# Altium PCB MatrixLED_8x8_1.9S_Pcb.PcbDoc
Units mil, origin at the board's own origin, x right, y up, seen from the top; angles counter-clockwise.
Board outline 780 x 780 mil, 2 copper layers (Top Layer, Bottom Layer); 8 components, 23 nets, 58 pads, 13 vias.
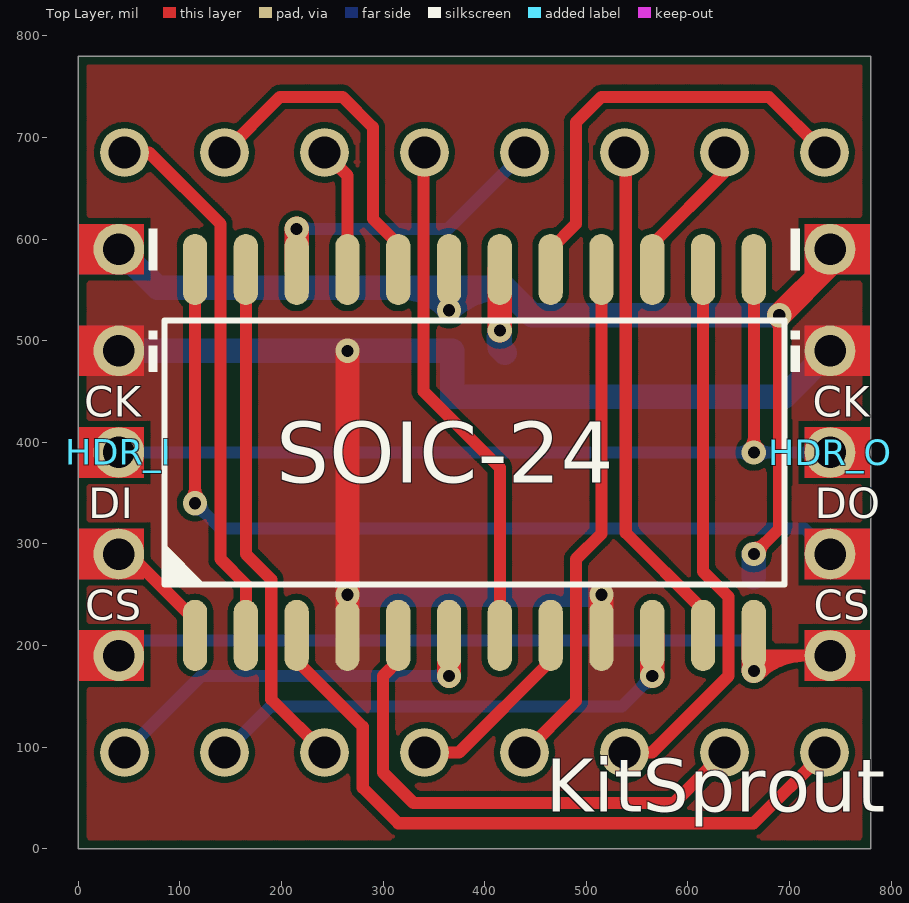
[diagram p0: Top Layer view]
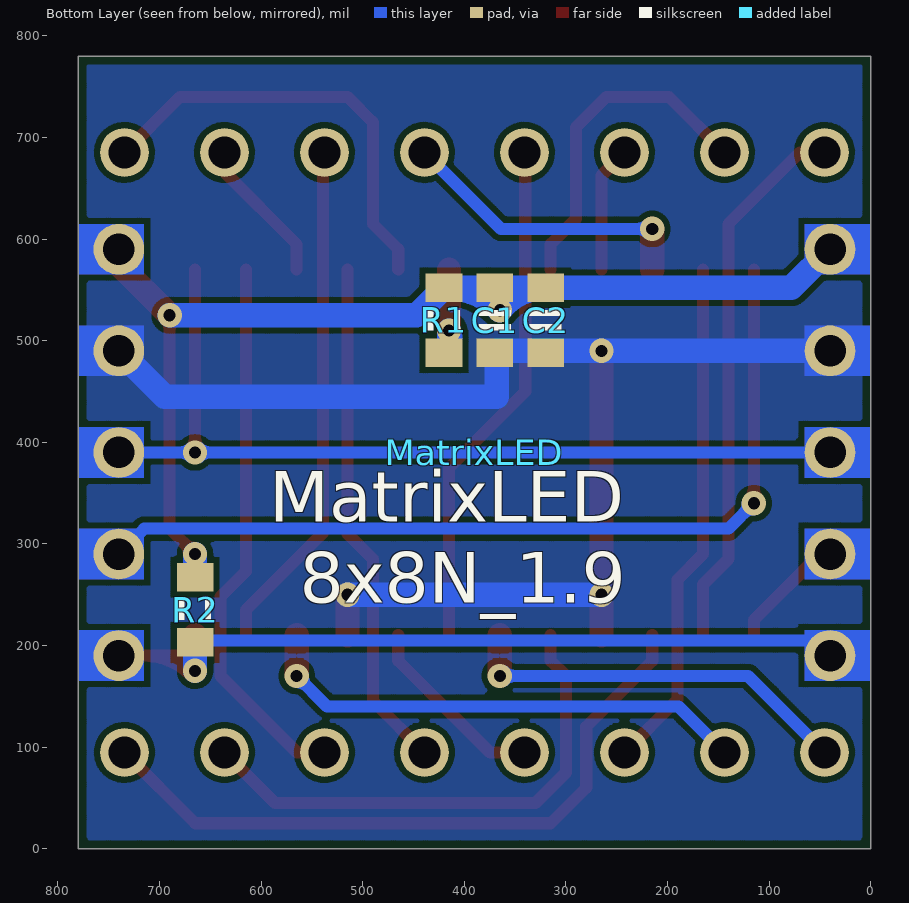
[diagram p1: Bottom Layer view, seen from below]
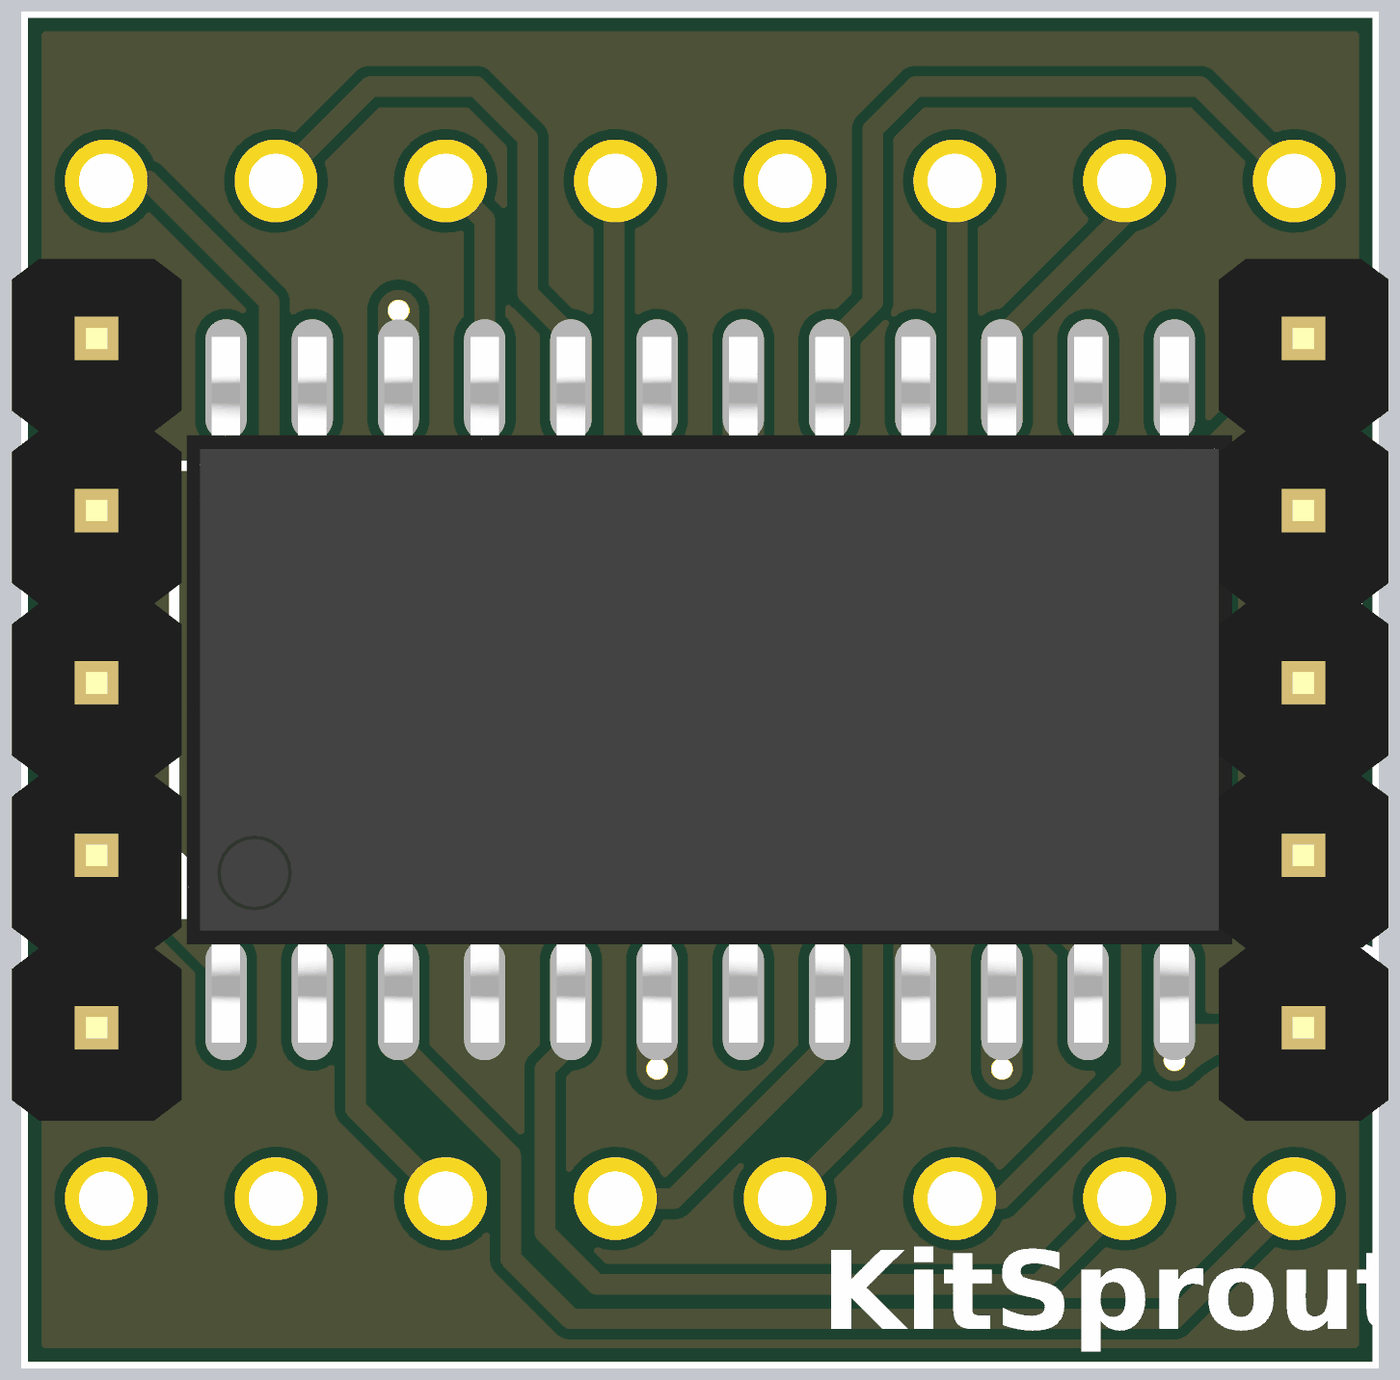
[diagram p2: 3D render of the assembled board from above, using the file's embedded part models]
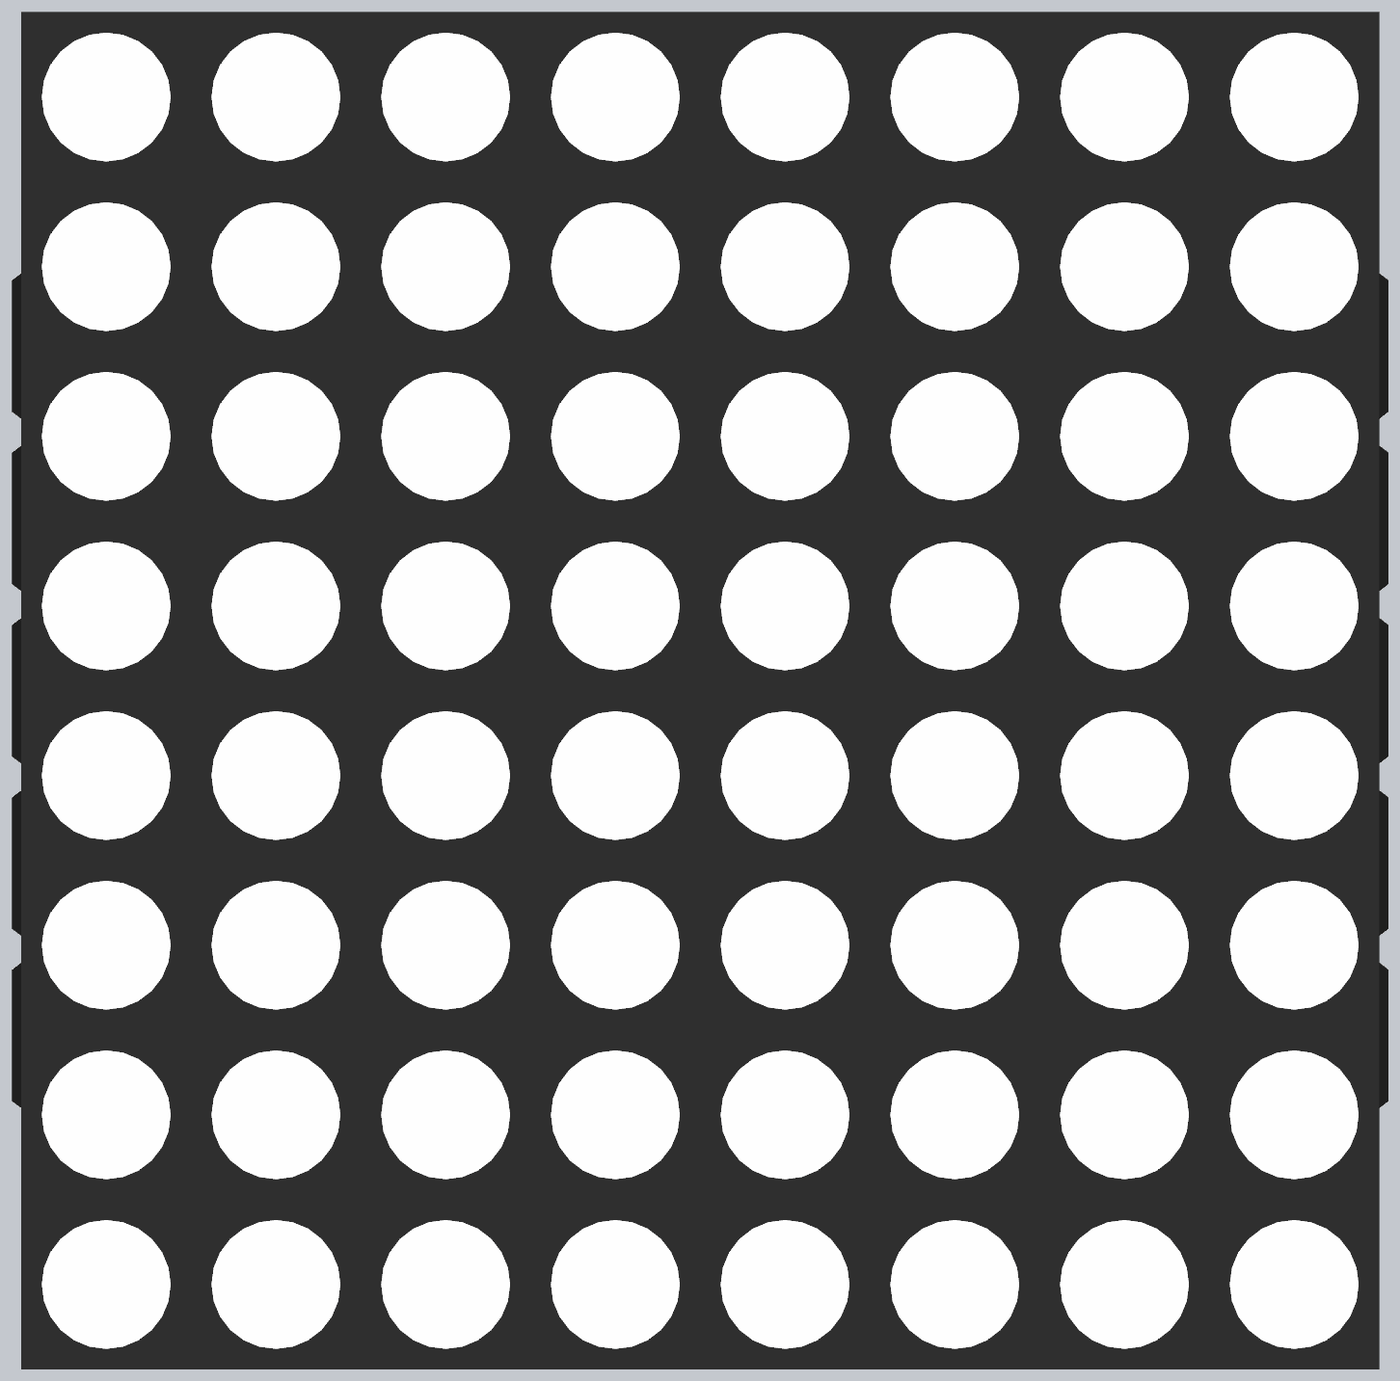
[diagram p3: 3D render of the assembled board from below, using the file's embedded part models]

## Layer stack, top to bottom
Top Solder: solder mask 0.4, Solder Resist, Dk 3.5
Top Layer: signal copper 1.4
Dielectric1: dielectric 12.6, FR-4, Dk 4.8
Bottom Layer: signal copper 1.4
Bottom Solder: solder mask 0.4, Solder Resist, Dk 3.5

## Board outline
0,0 780,0 780,780 0,780

## Design rules (kind name [scope] priority, off if disabled: settings)
Clearance ClearancePolygon [InPolygon] p1: gap=6
Clearance [All] p2: gap=6
ComponentClearance [All] p1: gap=0 collisioncheckmode=3 verticalgap=0 showdistances=FALSE
Height [All] p1: minheight=0 maxheight=5000 prefheight=500
HoleToHoleClearance [All] p1: gap=6 allowstackedmicrovias=TRUE
MinimumSolderMaskSliver [All] p1: minsoldermaskwidth=6
PlaneConnect [All] p1: planeconnectstyle=Direct reliefexpansion=20 reliefentries=4 reliefconductorwidth=20 reliefairgap=10
PolygonConnect [All] p1: connectstyle=Direct reliefconductorwidth=20 reliefentries=4 polygonreliefangle="90 Angle" airgapwidth=10
RoutingVias [All] p1: holewidth=12 width=20 viastyle="Through Hole" minholewidth=12 minwidth=20 maxholewidth=100 maxwidth=200
SilkToSilkClearance [All] p1: silktosilkclearance=0
SilkToSolderMaskClearance SilkscreenOverComponentPads [IsPad] p1: minsilkscreentomaskgap=1 clearancetoexposedcopper=TRUE
SolderMaskExpansion [All] p1: expansion=0
Width [All] p1: maxlimit=30 minlimit=6 preferedwidth=10
22 further rules are at their usual default settings.

## Components (designator, comment, footprint, x,y, rotation, side; value= is the part's Value field where it differs from the comment)
C1 "Cap_0603" CAP_0603 370,520 r90 bottom
C2 "Cap_0603" CAP_0603 320,520 r90 bottom
HDR_I "HDR1x5_2.54" HDR1X5_2.54_180 40,590 r0 top locked
HDR_O "HDR1x5_2.54" HDR1X5_2.54_180 740,590 r0 top locked
MatrixLED "LED_Matrix_8x8_1.9S" LED_Matrix_8x8_1.9S 390,390 r180 bottom locked
R1 "Res_0603" RES_0603 420,520 r90 bottom
R2 "Res_0603" RES_0603 665,235 r90 bottom
SOIC-24 "MAX7219/21" SOIC_E300_24 390,390 r90 top locked (schematic designator MAX7219)

## Footprints (in the part's own frame and the unit in brackets; to place one, negate y for a bottom-side part, rotate by r counter-clockwise, add the part's x,y. Pads: shape width x height; smd on the part's side, far side on the other; paste and mask are expansions set on the pad)
CAP_0603 [mil]
  rect 28x36 smd: 1(-32,0) 2(32,0)
  silkscreen extent -10,-16 10,16, body extent -31,-16 31,16, height 36
HDR1X5_2.54_180 [mil]
  round 50 hole 31: 1(0,0) 2(0,-100) 3(0,-200) 4(0,-300) 5(0,-400)
  body extent -49,-450 49,50, height 323
LED_Matrix_8x8_1.9S [mil]
  round 48 hole 31.5: 1(-344.49,-295.28) 2(-246.06,-295.28) 3(-147.64,-295.28) 4(-49.21,-295.28) 5(49.21,-295.28) 6(147.64,-295.28) 7(246.06,-295.28) 8(344.49,-295.28) 9(344.49,295.28) 10(246.06,295.28) 11(147.64,295.28) 12(49.21,295.28) 13(-49.21,295.28) 14(-147.64,295.28) 15(-246.06,295.28) 16(-344.49,295.28)
  body extent -394,-394 394,394, height 236
RES_0603 [mil]
  rect 28x36 smd: 1(-32,0) 2(32,0)
  silkscreen extent -10,-16 10,16, body extent -31,-16 32,16, height 20
SOIC_E300_24 [mil]
  oval 70x24 smd: 1(-180,275) 2(-180,225) 3(-180,175) 4(-180,125) 5(-180,75) 6(-180,25) 7(-180,-25) 8(-180,-75) 9(-180,-125) 10(-180,-175) 11(-180,-225) 12(-180,-275) 13(180,-275) 14(180,-225) 15(180,-175) 16(180,-125) 17(180,-75) 18(180,-25) 19(180,25) 20(180,75) 21(180,125) 22(180,175) 23(180,225) 24(180,275)
  silkscreen extent -130,-305 130,305, body extent -205,-308 205,298, height 102

## Part data
C1 C2: "Capacitor"
HDR_I: library part HDR1x5_2.54T, "Header"
HDR_O: "Header"
MatrixLED: "MatrixLED"
R1 R2: "Resistor"
SOIC-24: "Drivers"

## Via types
v1: diameter 24, hole 12, Top Layer to Bottom Layer, 13 vias

## Nets (pads, with @x,y where several pads share a name; then routed paths per layer and width w, separated by ;. In a path a pad name is that pad's centre, name@x,y a point inside that pad or via, vN(x,y) a via of type N, cw(c..) or ccw(c..) an arc to the next point about the centre after c; other vN are vias at no path point)
5V: C1.2 C2.2 HDR_I.1 HDR_O.1 R1.2 R2.2 SOIC-24.19 | length 1184.3
  Top Layer w12: v1(665,290) 690,315 v1(690,525) ; v1@665,296 ccw(c665,310.49) 675.24,300.24 ccw(c685.49,290) v1@671,290 ; v1@685.76,520.76 cw(c675.52,510.52) 690,510.52 cw(c704.49,510.52) v1@694.24,520.76
  Top Layer w24: v1(690,525) HDR_O.1@740,575
  Bottom Layer w24: HDR_I.1 78,552 C2.2 ; C1.2@365,547 v1(365,530) ; C1.2@365,552 C2.2 ; C1.2 R1.2 447,525 v1(690,525) ; R1.2@418.11,552 ccw(c418.11,476.89) v1(365,530) ; R2.2 v1(665,290) ; C2.2 cw(c320,494.98) v1(365,530)
CLK: HDR_I.3 HDR_O.3 SOIC-24.13 | length 948.3
  Top Layer w12: v1@660.76,394.24 ccw(c650.52,404.49) 665,404.49 ccw(c679.49,404.49) v1@669.24,394.24 ; v1(665,390) SOIC-24.13
  Bottom Layer w12: HDR_I.3 HDR_O.3 ; v1@660.76,385.76 ccw(c650.52,375.52) 650.52,390 ccw(c650.52,404.49) v1@660.76,394.24 ; v1@669.24,385.76 cw(c679.49,375.52) 679.49,390 cw(c679.49,404.49) v1@669.24,394.24
COL_0: MatrixLED.13 SOIC-24.22 | length 318.1
  Top Layer w24: SOIC-24.22 v1(215,610)
  Bottom Layer w12: v1(215,610) 363.94,610 MatrixLED.13 ; v1@219.24,605.76 cw(c229.49,595.52) 229.49,610 cw(c229.49,624.49) v1@219.24,614.24
COL_1: MatrixLED.3 SOIC-24.14 | length 543.9
  Top Layer w12: MatrixLED.3 564.72,94.72 640,170 640,247.93 615,272.93 SOIC-24.14
COL_2: MatrixLED.4 SOIC-24.16 | length 506.7
  Top Layer w12: MatrixLED.4 490,145.51 490,285 515,310 SOIC-24.16
COL_3: MatrixLED.10 SOIC-24.20 | length 331.5
  Top Layer w12: MatrixLED.10 198.66,740 260,740 290,710 290,620 315,595 SOIC-24.20
COL_4: MatrixLED.6 SOIC-24.23 | length 507.3
  Top Layer w12: SOIC-24.23 165,290 190,265 190,147.09 MatrixLED.6
COL_5: MatrixLED.11 SOIC-24.21 | length 124.7
  Top Layer w12: MatrixLED.11 265,662.64 SOIC-24.21
COL_6: MatrixLED.15 SOIC-24.15 | length 144.7
  Top Layer w12: SOIC-24.15 565,595 636.06,666.06 MatrixLED.15
COL_7: MatrixLED.16 SOIC-24.17 | length 432.9
  Top Layer w12: SOIC-24.17 465,590 490,615 490,715 515,740 679.76,740 MatrixLED.16
CS: HDR_I.5 HDR_O.5 R2.1 SOIC-24.12 | length 826.4
  Top Layer w12: SOIC-24.12@660.76,179.24 cw(c686.73,153.27) 686.73,190 ; SOIC-24.12@665,190 HDR_O.5 ; v1@669.24,170.76 cw(c715.7,124.3) HDR_O.5@715.7,190
  Top Layer w24: v1(665,175) 665,190 SOIC-24.12
  Bottom Layer w12: HDR_I.5@55,205 R2.1@663,205
  Bottom Layer w24: v1(665,175) R2.1
DIN: HDR_I.4 SOIC-24.1 | length 106.9
  Top Layer w12: HDR_I.4@50,290 115,225 SOIC-24.1
DOUT: HDR_O.4 SOIC-24.24 | length 921.2
  Top Layer w12: v1@110.76,344.24 ccw(c100.52,354.49) 115,354.49 ccw(c129.49,354.49) v1@119.24,344.24 ; v1(115,340) SOIC-24.24
  Bottom Layer w12: v1@115,334 cw(c115,319.52) 125.24,329.76 cw(c135.49,340) v1@121,340 ; v1(115,340) 140,315 715,315 HDR_O.4
GND: C1.1 C2.1 HDR_I.2 HDR_O.2 SOIC-24.4 SOIC-24.9 | length 1333.6
  Top Layer w24: SOIC-24.4 v1(265,250) v1(265,490) ; SOIC-24.9 v1(515,250)
  Bottom Layer w24: HDR_I.2 368,490 368,445 695,445 HDR_O.2 ; v1(265,250) v1(515,250)
NetMAX7219_18: R1.1 SOIC-24.18 | length 107.9
  Top Layer w24: v1(415,510) SOIC-24.18
  Bottom Layer w24: R1.1@415,493 v1(415,510) ccw(c434.97,502.97) R1.1 R1.1@415,493
ROW_0: MatrixLED.9 SOIC-24.2 | length 539
  Top Layer w12: MatrixLED.9 69.72,685.28 140,615 140,285 165,260 SOIC-24.2
ROW_1: MatrixLED.14 SOIC-24.11 | length 507.3
  Top Layer w12: MatrixLED.14 539,683.91 539,311 615,235 SOIC-24.11
ROW_2: MatrixLED.8 SOIC-24.6 | length 413.4
  Top Layer w24: v1(365,170) SOIC-24.6
  Bottom Layer w12: MatrixLED.8 120.79,170 v1(365,170) ; v1@360.76,165.76 ccw(c350.52,155.52) 350.52,170 ccw(c350.52,184.49) v1@360.76,174.24
ROW_3: MatrixLED.12 SOIC-24.7 | length 506.7
  Top Layer w12: MatrixLED.12 340,684.49 340,450 415,375 SOIC-24.7
ROW_4: MatrixLED.1 SOIC-24.3 | length 674.8
  Top Layer w12: SOIC-24.3 215,185 280,120 280,60 315,25 664.76,25 MatrixLED.1
ROW_5: MatrixLED.7 SOIC-24.10 | length 515
  Top Layer w24: v1(565,170) SOIC-24.10
  Bottom Layer w12: MatrixLED.7 189.21,140 535,140 v1(565,170) ; v1@559,170 cw(c544.52,170) 554.76,159.76 cw(c565,149.52) v1@565,164
ROW_6: MatrixLED.2 SOIC-24.5 | length 510.3
  Top Layer w12: SOIC-24.5 315,185 300,170 300,75 330,45 586.34,45 MatrixLED.2
ROW_7: MatrixLED.5 SOIC-24.8 | length 186.6
  Top Layer w12: MatrixLED.5 374.72,94.72 465,185 SOIC-24.8

## Polygon pours and split planes (outlines as drawn)
GND on Top Layer "Mechanical 1-No Net" (hatched 90Degree grid 2 track 4, remove dead copper, pour order 3): 10,770 105,770 120,770 770,770 770,715 770,10 725,10 10,10
GND on Bottom Layer "Mechanical 1-No Net" (hatched 90Degree grid 2 track 4, remove dead copper, pour order 4): 10,770 105,770 120,770 770,770 770,715 770,10 725,10 10,10

## Other copper
Multi-Layer:
  rectangle net 5V: 715,565 780,615
  rectangle net CS: 715,165 780,215
  rectangle net DOUT: 715,265 780,315
  rectangle net CLK: 715,365 780,415
  rectangle net GND: 715,465 780,515
  region net CS: 65,215 0,215 0,165 65,165
  region net DIN: 65,315 0,315 0,265 65,265
  region net CLK: 65,415 0,415 0,365 65,365
  region net GND: 65,515 0,515 0,465 65,465
  region net 5V: 65,615 0,615 0,565 65,565

## Silkscreen, mask and mechanical layers (free items; w line width, h text height)
Top Overlay:
  region: 78,610 70,610 70,570 78,570
  region: 78,495 70,495 70,470 78,470
  region: 78,510 70,510 70,502 78,502
  region: 710,510 702,510 702,502 710,502
  region: 710,495 702,495 702,470 710,470
  region: 710,610 702,610 702,570 710,570
  lines w1: 70,470 78,470 78,495 70,495 70,470 ; 70,502 70,510 78,510 78,502 70,502 ; 70,570 70,610 78,610 78,570 70,570 ; 702,470 702,495 710,495 710,470 702,470 ; 702,502 710,502 710,510 702,510 702,502 ; 702,570 710,570 710,610 702,610 702,570
  text "CK" at 6,425 h30
  text "CK" at 723,425 h30
  text "DI" at 10,325 h30
  text "DO" at 725,325 h30
  text "CS" at 7,225 h30
  text "CS" at 724,225 h30
  text "KitSprout" at 460,19 h90
Bottom Overlay:
  text "MatrixLED" at 592,322 h50
  text "8x8N_1.9" at 562,242 h50
Top Solder:
  rectangle: 715,565 780,615
  rectangle: 715,165 780,215
  rectangle: 715,265 780,315
  rectangle: 715,365 780,415
  rectangle: 715,465 780,515
  region: 65,215 0,215 0,165 65,165
  region: 65,315 0,315 0,265 65,265
  region: 65,415 0,415 0,365 65,365
  region: 65,515 0,515 0,465 65,465
  region: 65,615 0,615 0,565 65,565
Bottom Solder:
  rectangle: 715,565 780,615
  rectangle: 715,165 780,215
  rectangle: 715,265 780,315
  rectangle: 715,365 780,415
  rectangle: 715,465 780,515
  region: 65,215 0,215 0,165 65,165
  region: 65,315 0,315 0,265 65,265
  region: 65,415 0,415 0,365 65,365
  region: 65,515 0,515 0,465 65,465
  region: 65,615 0,615 0,565 65,565
Mechanical 1:
  the board outline again, w2

## Dimensions
780,0 to 780,780 on Mechanical 13
0,780 to 780,780 on Mechanical 13